# EAGLE board Demux (EAGLE 7.7.0)
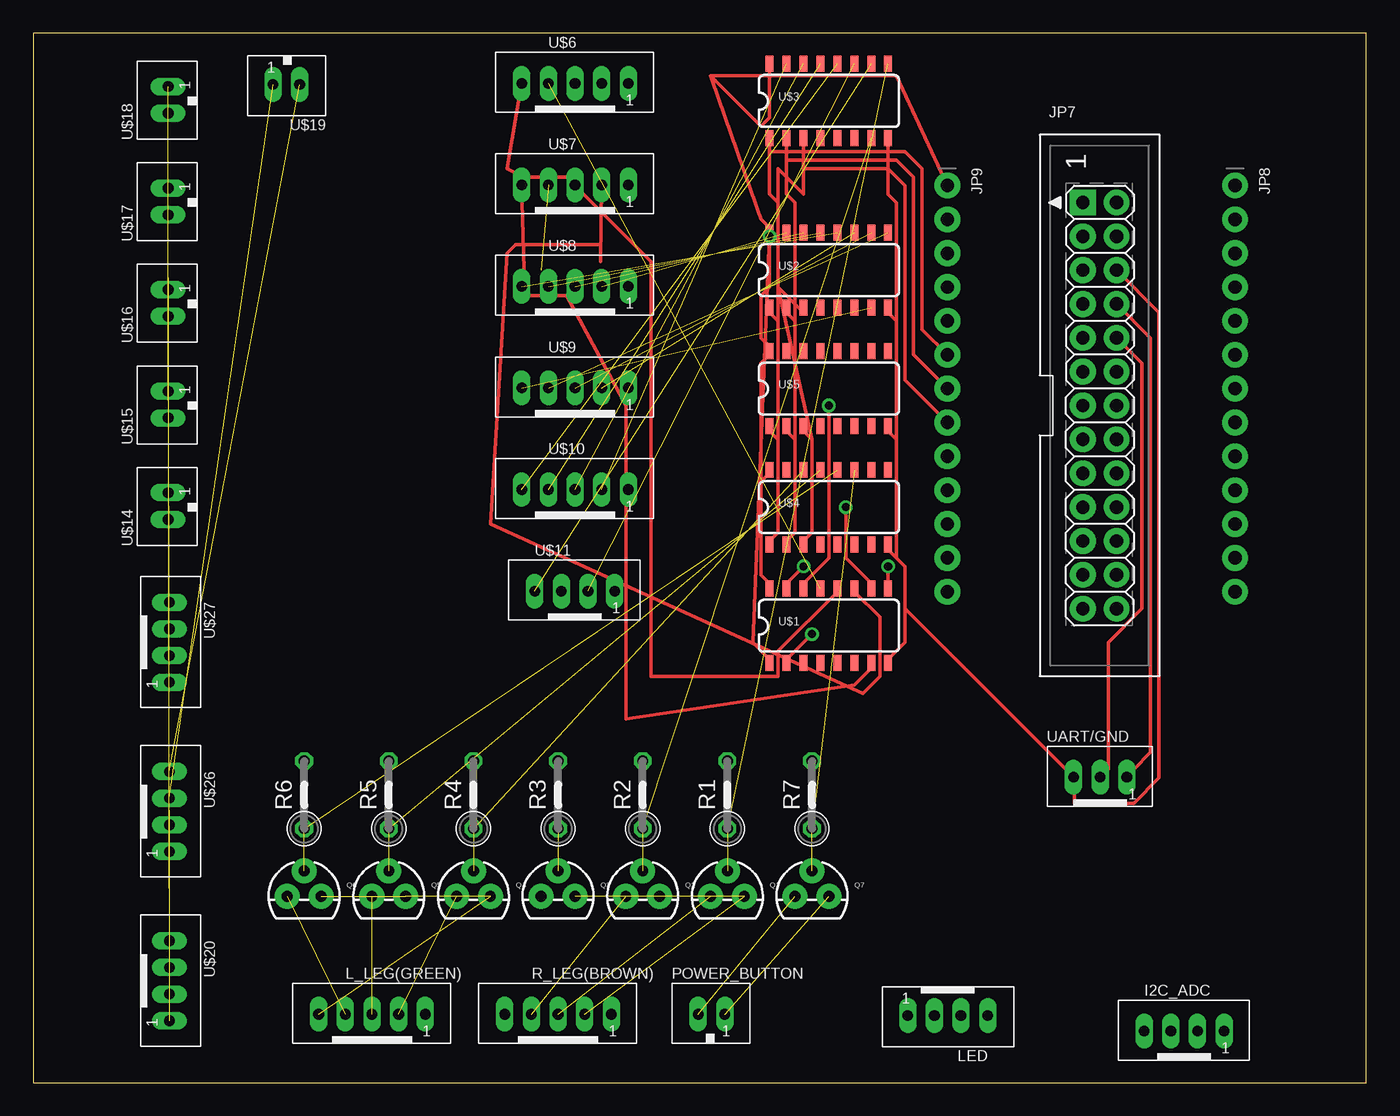
[diagram p0: board, top side]
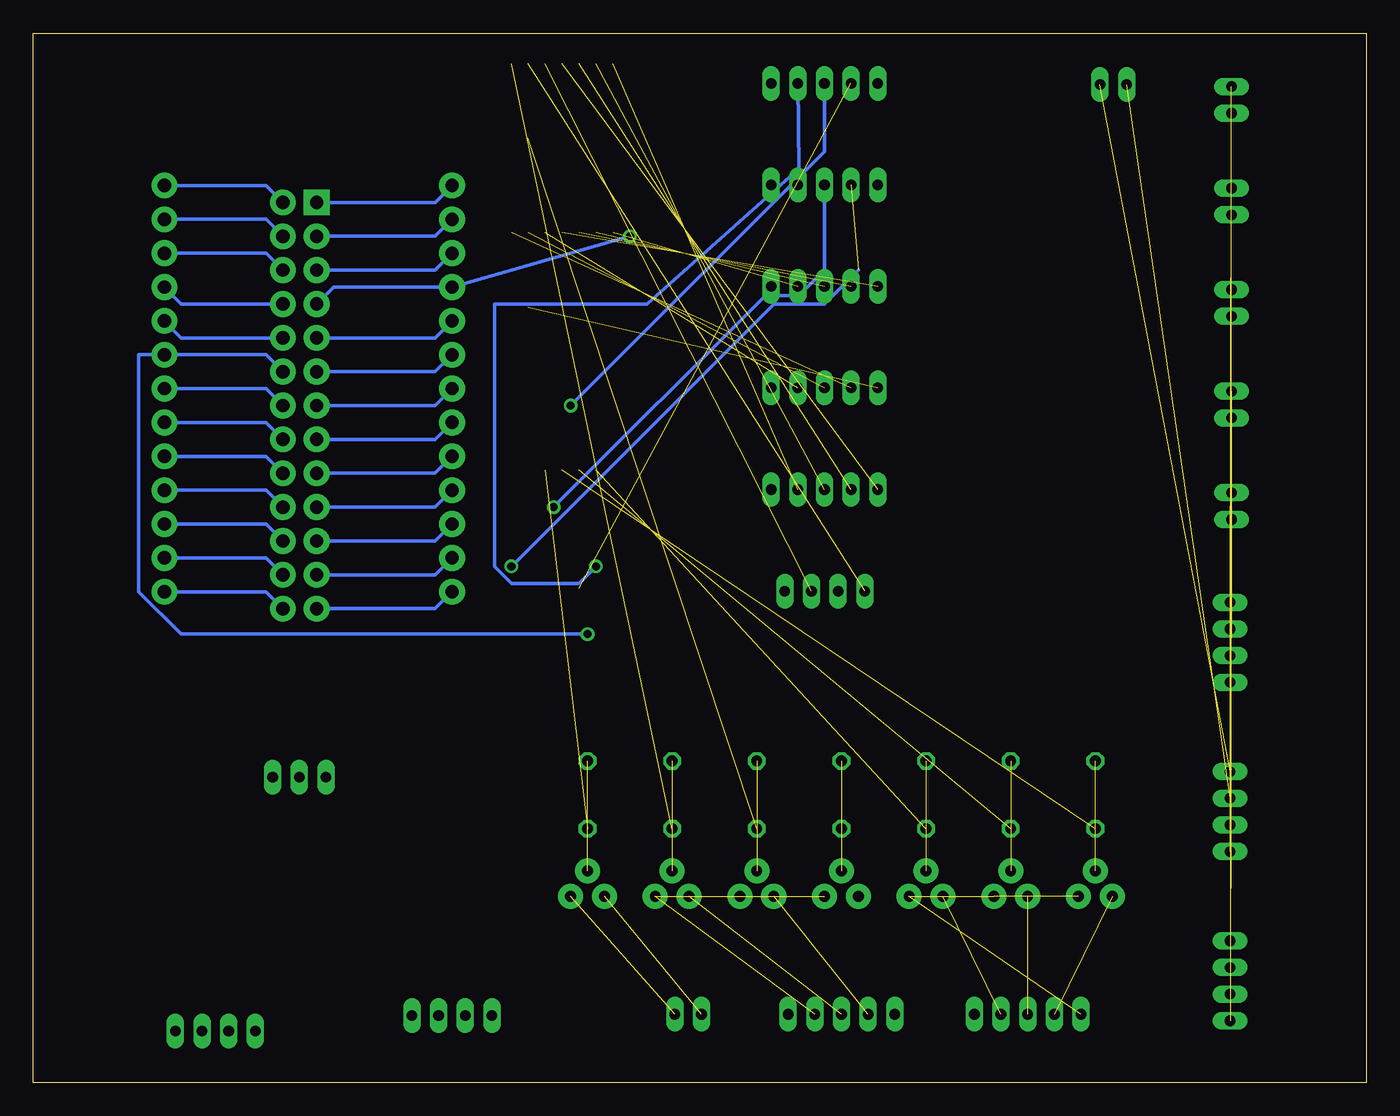
[diagram p1: board, bottom side, seen from below]

Size 100 x 78.73 mm. Coordinates in mm from the lower left corner, seen from the top.
Outline: 0,0 100,0 100,78.73 0,78.73 0,0
Copper layers (1*16): Top 0.035mm / dielectric 1.5mm / Bottom 0.035mm
Design rules "default": minimum track width 10mil, minimum drill 24mil, track to track 8mil, track to pad 8mil, pad to pad 8mil, via to via 8mil, smd to smd 8mil, copper to edge 40mil, drill to drill 8mil, minimum pad ring 10mil, minimum via ring 8mil, stop-mask expansion 4mil, vias tented up to drill 0mil, thermal gap 10mil

## Footprints (pad centres in the part's own frame; a part is rotated, then mirrored left to right if it is on the bottom)
JST_B4B-PH_HEADER = drill 0.8 long: P1 2.98,0.048; P2 0.98,0.048; P3 -1.02,0.048; P4 -3.02,0.048
RASBERRYPI_IDC = drill 1 pad 1.93 square: 1 -1.27,15.24 | drill 1 pad 1.93: 2 1.27,15.24; 3 -1.27,12.7; 4 1.27,12.7; 5 -1.27,10.16; 6 1.27,10.16; 7 -1.27,7.62; 8 1.27,7.62; 9 -1.27,5.08; 10 1.27,5.08; 11 -1.27,2.54; 12 1.27,2.54; 13 -1.27,0; 14 1.27,0; 15 -1.27,-2.54; 16 1.27,-2.54; 17 -1.27,-5.08; 18 1.27,-5.08; 19 -1.27,-7.62; 20 1.27,-7.62; 21 -1.27,-10.16; 22 1.27,-10.16; 23 -1.27,-12.7; 24 1.27,-12.7; 25 -1.27,-15.24; 26 1.27,-15.24
1X13_ROUND_76MIL = drill 1 pad 1.93: 1 -15.24,0; 2 -12.7,0; 3 -10.16,0; 4 -7.62,0; 5 -5.08,0; 6 -2.54,0; 7 0,0; 8 2.54,0; 9 5.08,0; 10 7.62,0; 11 10.16,0; 12 12.7,0; 13 15.24,0
JST_B5B-PH_HEADER = drill 0.8 long: P1 4,0.048; P2 2,0.048; P3 0,0.048; P4 -2,0.048; P5 -4,0.048
JST_B2B-PH_HEADER = drill 0.8 long: P1 1.075,0.048; P2 -0.925,0.048
TO-92 = drill 0.813 pad 1.88: 1 -1.27,0; 2 0,1.905; 3 1.27,0
0207/5V = drill 0.813 octagon: 1 -2.54,0; 2 2.54,0
SO016 = smd 0.6 x 1.2: 1 -4.445,-2.8; 2 -3.175,-2.8; 3 -1.905,-2.8; 4 -0.635,-2.8; 5 0.635,-2.8; 6 1.905,-2.8; 7 3.175,-2.8; 8 4.445,-2.8; 9 4.445,2.8; 10 3.175,2.8; 11 1.905,2.8; 12 0.635,2.8; 13 -0.635,2.8; 14 -1.905,2.8; 15 -3.175,2.8; 16 -4.445,2.8
JST_B3B-PH_HEADER = drill 0.8 long: P1 2.027,0.048; P2 0.028,0.048; P3 -1.972,0.048

## Placement (x,y rotation side)
FRAME1  FRAME-LETTER  [CREATIVE_COMMONS]  -101.6,0 0 top  (outside the outline)
I2C_ADC  JST-PH_4-PIN_HEADER  [JST_B4B-PH_HEADER]  86.36,3.81 0 top
JP7  PI  [RASBERRYPI_IDC]  80.01,50.8 0 top
JP8  Right  [1X13_ROUND_76MIL]  90.17,52.07 270 top
JP9  Left  [1X13_ROUND_76MIL]  68.58,52.07 270 top
L_LEG(GREEN)  JST-PH_5-PIN_HEADER  [JST_B5B-PH_HEADER]  25.4,5.08 0 top
LED  JST-PH_4-PIN_HEADER  [JST_B4B-PH_HEADER]  68.58,5.08 180 top
POWER_BUTTON  JST-PH_2-PIN_HEADER  [JST_B2B-PH_HEADER]  50.8,5.08 0 top
Q1  [TO-92]  52.07,13.97 0 top
Q2  [TO-92]  45.72,13.97 0 top
Q3  [TO-92]  39.37,13.97 0 top
Q4  [TO-92]  33.02,13.97 0 top
Q5  [TO-92]  26.67,13.97 0 top
Q6  [TO-92]  20.32,13.97 0 top
Q7  [TO-92]  58.42,13.97 0 top
R1  [0207/5V]  52.07,21.59 90 top
R2  [0207/5V]  45.72,21.59 90 top
R3  [0207/5V]  39.37,21.59 90 top
R4  [0207/5V]  33.02,21.59 90 top
R5  [0207/5V]  26.67,21.59 90 top
R6  [0207/5V]  20.32,21.59 90 top
R7  [0207/5V]  58.42,21.59 90 top
R_LEG(BROWN)  JST-PH_5-PIN_HEADER  [JST_B5B-PH_HEADER]  39.37,5.08 0 top
U$1  74LVC138AD  [SO016]  59.69,34.29 0 top
U$2  74LVC138AD  [SO016]  59.69,60.96 0 top
U$3  74LVC138AD  [SO016]  59.69,73.66 0 top
U$4  74LVC138AD  [SO016]  59.69,43.18 0 top
U$5  74LVC138AD  [SO016]  59.69,52.07 0 top
U$6  JST-PH_5-PIN_HEADER  [JST_B5B-PH_HEADER]  40.64,74.93 0 top
U$7  JST-PH_5-PIN_HEADER  [JST_B5B-PH_HEADER]  40.64,67.31 0 top
U$8  JST-PH_5-PIN_HEADER  [JST_B5B-PH_HEADER]  40.64,59.69 0 top
U$9  JST-PH_5-PIN_HEADER  [JST_B5B-PH_HEADER]  40.64,52.07 0 top
U$10  JST-PH_5-PIN_HEADER  [JST_B5B-PH_HEADER]  40.64,44.45 0 top
U$11  JST-PH_4-PIN_HEADER  [JST_B4B-PH_HEADER]  40.64,36.83 0 top
U$14  JST-PH_2-PIN_HEADER  [JST_B2B-PH_HEADER]  10.16,43.18 90 top
U$15  JST-PH_2-PIN_HEADER  [JST_B2B-PH_HEADER]  10.16,50.8 90 top
U$16  JST-PH_2-PIN_HEADER  [JST_B2B-PH_HEADER]  10.16,58.42 90 top
U$17  JST-PH_2-PIN_HEADER  [JST_B2B-PH_HEADER]  10.16,66.04 90 top
U$18  JST-PH_2-PIN_HEADER  [JST_B2B-PH_HEADER]  10.16,73.66 90 top
U$19  JST-PH_2-PIN_HEADER  [JST_B2B-PH_HEADER]  19.05,74.93 180 top
U$20  JST-PH_4-PIN_HEADER  [JST_B4B-PH_HEADER]  10.16,7.62 270 top
U$26  JST-PH_4-PIN_HEADER  [JST_B4B-PH_HEADER]  10.16,20.32 270 top
U$27  JST-PH_4-PIN_HEADER  [JST_B4B-PH_HEADER]  10.16,33.02 270 top
UART/GND  JST-PH_3-PIN_HEADER  [JST_B3B-PH_HEADER]  80.01,22.86 0 top

## Library data of the parts
FRAME1 = SparkFun-Aesthetics
I2C_ADC L_LEG(GREEN) LED POWER_BUTTON R_LEG(BROWN) U$6-U$11 U$14-U$20 U$26 U$27 UART/GND = SRG
JP7-JP9 = microbuilder
Q1-Q7 = SparkFun-DiscreteSemi; PROD_ID: TRANS-08447
R1-R7 = resistor
U$1-U$5 = SparkFun-DigitalIC

## Nets
3.3V: JP7.1 JP9.1 U$1.16 U$2.16 U$3.16 U$4.16 U$5.16
5.0V: JP7.2 JP8.1
GND: JP7.6 JP8.3 U$1.8 U$2.8 U$3.8 U$4.8 U$5.8 UART/GND.P3
N$1: JP7.11 JP9.6 U$2.1 U$3.1 U$4.1 U$5.1
N$2: JP7.13 JP9.7 U$2.2 U$3.2 U$4.2 U$5.2
N$3: JP7.15 JP9.8 U$2.3 U$3.3 U$4.3 U$5.3
N$4: U$1.15 U$6.P2
N$5: U$1.14 U$6.P3
N$6: U$1.13 U$6.P4
N$7: U$1.12 U$6.P5
N$8: U$1.11 U$7.P2
N$9: U$1.10 U$7.P3
N$10: U$1.9 U$7.P4
N$11: U$1.7 U$7.P5
N$12: U$2.15 U$8.P2
N$13: U$2.14 U$8.P3
N$14: U$2.13 U$8.P4
N$15: U$2.12 U$8.P5
N$16: U$2.11 U$9.P2
N$17: U$2.10 U$9.P3
N$18: U$2.9 U$9.P4
N$19: U$2.7 U$9.P5
N$20: U$3.15 U$10.P2
N$21: U$3.14 U$10.P3
N$22: U$3.13 U$10.P4
N$23: U$3.12 U$10.P5
N$24: U$3.11 U$11.P2
N$25: U$3.10 U$11.P4
N$26: R2.1 U$3.7
N$27: U$14.P1 U$20.P1
N$28: U$14.P2 U$20.P2
N$29: U$15.P1 U$20.P3
N$30: U$15.P2 U$20.P4
N$31: U$16.P1 U$27.P1
N$32: U$16.P2 U$27.P2
N$33: U$17.P1 U$27.P3
N$34: U$17.P2 U$27.P4
N$35: U$18.P1 U$26.P1
N$36: U$18.P2 U$26.P2
N$37: U$19.P1 U$26.P3
N$38: U$19.P2 U$26.P4
N$39: Q1.2 R1.2
N$40: Q3.2 R3.2
N$41: Q2.2 R2.2
N$42: Q4.2 R4.2
N$43: Q5.2 R5.2
N$44: Q6.2 R6.2
N$45: R1.1 U$3.9
N$46: R3.1
N$47: R4.1 U$4.14
N$48: R5.1 U$4.13
N$49: Q1.3 Q2.3 Q3.3 R_LEG(BROWN).P2
N$50: R6.1 U$4.12
N$51: JP7.3 JP9.2
N$52: JP7.5 JP9.3
N$53: JP7.7 JP9.4 U$1.1
N$54: JP7.9 JP9.5
N$55: Q1.1 R_LEG(BROWN).P3
N$56: Q2.1 R_LEG(BROWN).P4
N$57: R_LEG(BROWN).P5
N$58: JP7.17 JP9.9
N$59: JP7.19 JP9.10
N$60: JP7.21 JP9.11
N$61: JP7.23 JP9.12
N$62: JP7.25 JP9.13
N$63: JP7.4 JP8.2
N$64: JP7.8 JP8.4 UART/GND.P1
N$65: JP7.10 JP8.5 UART/GND.P2
N$66: JP7.12 JP8.6 U$1.2
N$67: JP7.14 JP8.7
N$68: JP7.16 JP8.8
N$69: JP7.18 JP8.9
N$70: JP7.20 JP8.10
N$71: JP7.22 JP8.11
N$72: JP7.24 JP8.12
N$73: JP7.26 JP8.13
N$74: L_LEG(GREEN).P2 Q4.1
N$75: L_LEG(GREEN).P3 Q5.1
N$76: L_LEG(GREEN).P5 Q4.3 Q5.3 Q6.3
N$77: L_LEG(GREEN).P4 Q6.1
N$78: Q7.2 R7.2
N$79: POWER_BUTTON.P1 Q7.3
N$80: POWER_BUTTON.P2 Q7.1
N$81: R7.1 U$4.11

## Tracks (layer width: path | path; a pad name or v marks a point on that pad's centre or on a via)
3.3V
  Top 0.254: 54.61,45.08 54.61,38.1 55.24,37.46 U$1.16 | 54.61,45.08 55.24,45.72 U$4.16 | 54.61,45.08 54.61,53.97 55.24,54.61 U$5.16 55.24,55.24 54.61,55.88 54.61,59.05 55.24,59.69 U$2.16 55.24,64.14 54.61,64.77 50.8,75.56 | 50.8,75.56 54.61,71.76 55.24,72.39 U$3.16 | 50.8,75.56 64.77,75.56 JP9.1
  Bottom 0.254: JP9.1 69.85,66.04 JP7.1
5.0V
  Bottom 0.254: JP7.2 82.55,67.31 JP8.1
GND
  Top 0.254: 65.41,35.56 65.41,38.73 64.77,39.37 | 65.41,35.56 65.41,33.02 64.14,31.75 U$1.8 | 64.77,39.37 64.14,40 U$4.8 | 64.77,48.26 64.14,48.89 U$5.8 | 64.77,39.37 64.77,48.26 | 64.77,57.15 64.14,57.78 U$2.8 | 64.77,48.26 64.77,57.15 | 64.77,57.15 64.77,66.04 64.14,66.67 U$3.8 | 65.41,35.56 77.47,23.5 UART/GND.P3 78.11,22.86 78.11,20.96 82.55,20.96 84.45,22.86 84.45,57.78 JP7.6
  Bottom 0.254: JP7.6 82.55,62.23 JP8.3
N$1
  Top 0.254: 55.88,48.26 55.88,41.27 55.24,40.64 U$4.1 | 55.88,48.26 55.24,48.89 U$5.1 | 55.88,57.15 55.24,57.78 U$2.1 | 55.88,48.26 55.88,57.15 | 55.88,57.15 55.88,66.04 55.24,66.67 U$3.1 55.24,69.85 65.41,69.85 66.67,68.58 66.67,56.51 JP9.6
  Bottom 0.254: JP9.6 69.85,53.34 JP7.11
N$2
  Top 0.254: 57.15,48.26 57.15,41.27 56.52,40.64 U$4.2 | 57.15,48.26 56.52,48.89 U$5.2 | 57.15,57.15 56.52,57.78 U$2.2 | 57.15,48.26 57.15,57.15 | 57.15,57.15 57.15,66.04 56.52,66.67 U$3.2 56.52,69.22 64.77,69.22 66.04,67.95 66.04,54.61 JP9.7
  Bottom 0.254: JP9.7 69.85,50.8 JP7.13
N$3
  Top 0.254: 58.42,48.26 58.42,41.27 57.78,40.64 U$4.3 | 58.42,48.26 57.78,48.89 U$5.3 | 55.88,59.69 57.78,57.78 U$2.3 | 58.42,48.26 55.88,59.69 | 55.88,59.69 55.88,68.58 57.78,66.67 U$3.3 57.78,68.58 64.14,68.58 65.41,67.31 65.41,52.7 JP9.8
  Bottom 0.254: JP9.8 69.85,48.26 JP7.15
N$4  (via drill 0.61)
  Top 0.254: v57.78,38.73 56.52,37.46 U$1.15
  Bottom 0.254: v57.78,38.73 59.05,37.46 64.14,37.46 65.41,38.73 65.41,58.42 53.98,58.42 42.55,68.58 U$6.P2
N$5  (via drill 0.61)
  Top 0.254: v59.69,50.8 59.69,39.37 57.78,37.46 U$1.14
  Bottom 0.254: v59.69,50.8 40.64,69.85 U$6.P3
N$6  (1 unrouted)
N$7
  Top 0.254: U$1.12 60.33,36.83 55.88,32.38 55.88,30.48 46.35,30.48 46.35,61.59 40.01,67.95 36.83,67.95 35.56,68.58 U$6.P5
N$8
  Top 0.254: U$1.11 61.59,36.83 63.5,34.92 63.5,30.48 62.23,29.21 34.29,41.91 35.56,62.23 36.2,62.87 42.55,62.87 42.55,61.59 U$7.P2
N$9  (via drill 0.61)
  Top 0.254: v60.96,43.18 60.96,39.37 62.87,37.46 U$1.10
  Bottom 0.254: v60.96,43.18 45.09,59.05 42.55,59.05 40.64,60.96 U$7.P3
N$10  (via drill 0.61)  (1 unrouted)
  Top 0.254: v64.14,38.73 U$1.9
  Bottom 0.254: v64.14,38.73 44.45,58.42 40.64,58.42 38.1,60.96
N$11
  Top 0.254: U$1.7 62.87,31.11 61.59,29.84 44.45,27.3 44.45,50.8 40.01,59.05 36.83,59.05 36.83,60.96 U$7.P5
N$12  (1 unrouted)
N$13  (1 unrouted)
N$14  (1 unrouted)
N$15  (1 unrouted)
N$16  (1 unrouted)
N$17  (1 unrouted)
N$18  (1 unrouted)
N$19  (1 unrouted)
N$20  (1 unrouted)
N$21  (1 unrouted)
N$22  (1 unrouted)
N$23  (1 unrouted)
N$24  (1 unrouted)
N$25  (1 unrouted)
N$26  (1 unrouted)
N$27  (1 unrouted)
N$28  (1 unrouted)
N$29  (1 unrouted)
N$30  (1 unrouted)
N$31  (1 unrouted)
N$32  (1 unrouted)
N$33  (1 unrouted)
N$34  (1 unrouted)
N$35  (1 unrouted)
N$36  (1 unrouted)
N$37  (1 unrouted)
N$38  (1 unrouted)
N$39  (1 unrouted)
N$40  (1 unrouted)
N$41  (1 unrouted)
N$42  (1 unrouted)
N$43  (1 unrouted)
N$44  (1 unrouted)
N$45  (1 unrouted)
N$47  (1 unrouted)
N$48  (1 unrouted)
N$49  (3 unrouted)
N$50  (1 unrouted)
N$51
  Bottom 0.254: JP9.2 69.85,63.5 JP7.3
N$52
  Bottom 0.254: JP9.3 69.85,60.96 JP7.5
N$53  (via drill 0.61)
  Top 0.254: v55.24,63.5 53.98,33.02 55.24,31.75 U$1.1
  Bottom 0.254: v55.24,63.5 JP9.4 77.47,59.69 JP7.7
N$54
  Bottom 0.254: JP9.5 69.85,55.88 JP7.9
N$55  (1 unrouted)
N$56  (1 unrouted)
N$58
  Bottom 0.254: JP9.9 69.85,45.72 JP7.17
N$59
  Bottom 0.254: JP9.10 69.85,43.18 JP7.19
N$60
  Bottom 0.254: JP9.11 69.85,40.64 JP7.21
N$61
  Bottom 0.254: JP9.12 69.85,38.1 JP7.23
N$62
  Bottom 0.254: JP9.13 69.85,35.56 JP7.25
N$63
  Bottom 0.254: JP7.4 82.55,64.77 JP8.2
N$64
  Top 0.254: JP7.8 83.82,55.88 83.82,24.77 82.55,23.5 UART/GND.P1
  Bottom 0.254: JP8.4 88.9,58.42 JP7.8
N$65
  Top 0.254: JP7.10 83.19,53.97 83.19,35.56 80.64,33.02 80.64,23.5 UART/GND.P2
  Bottom 0.254: JP8.5 88.9,55.88 JP7.10
N$66  (via drill 0.61)
  Top 0.254: v58.42,33.65 56.52,31.75 U$1.2
  Bottom 0.254: v58.42,33.65 88.9,33.65 92.08,36.83 92.08,54.61 JP8.6 82.55,54.61 JP7.12
N$67
  Bottom 0.254: JP7.14 82.55,52.07 JP8.7
N$68
  Bottom 0.254: JP7.16 82.55,49.53 JP8.8
N$69
  Bottom 0.254: JP7.18 82.55,46.99 JP8.9
N$70
  Bottom 0.254: JP7.20 82.55,44.45 JP8.10
N$71
  Bottom 0.254: JP7.22 82.55,41.91 JP8.11
N$72
  Bottom 0.254: JP7.24 82.55,39.37 JP8.12
N$73
  Bottom 0.254: JP7.26 82.55,36.83 JP8.13
N$74  (1 unrouted)
N$75  (1 unrouted)
N$76  (3 unrouted)
N$77  (1 unrouted)
N$78  (1 unrouted)
N$79  (1 unrouted)
N$80  (1 unrouted)
N$81  (1 unrouted)